# EAGLE board untitled (EAGLE 8.6.0)
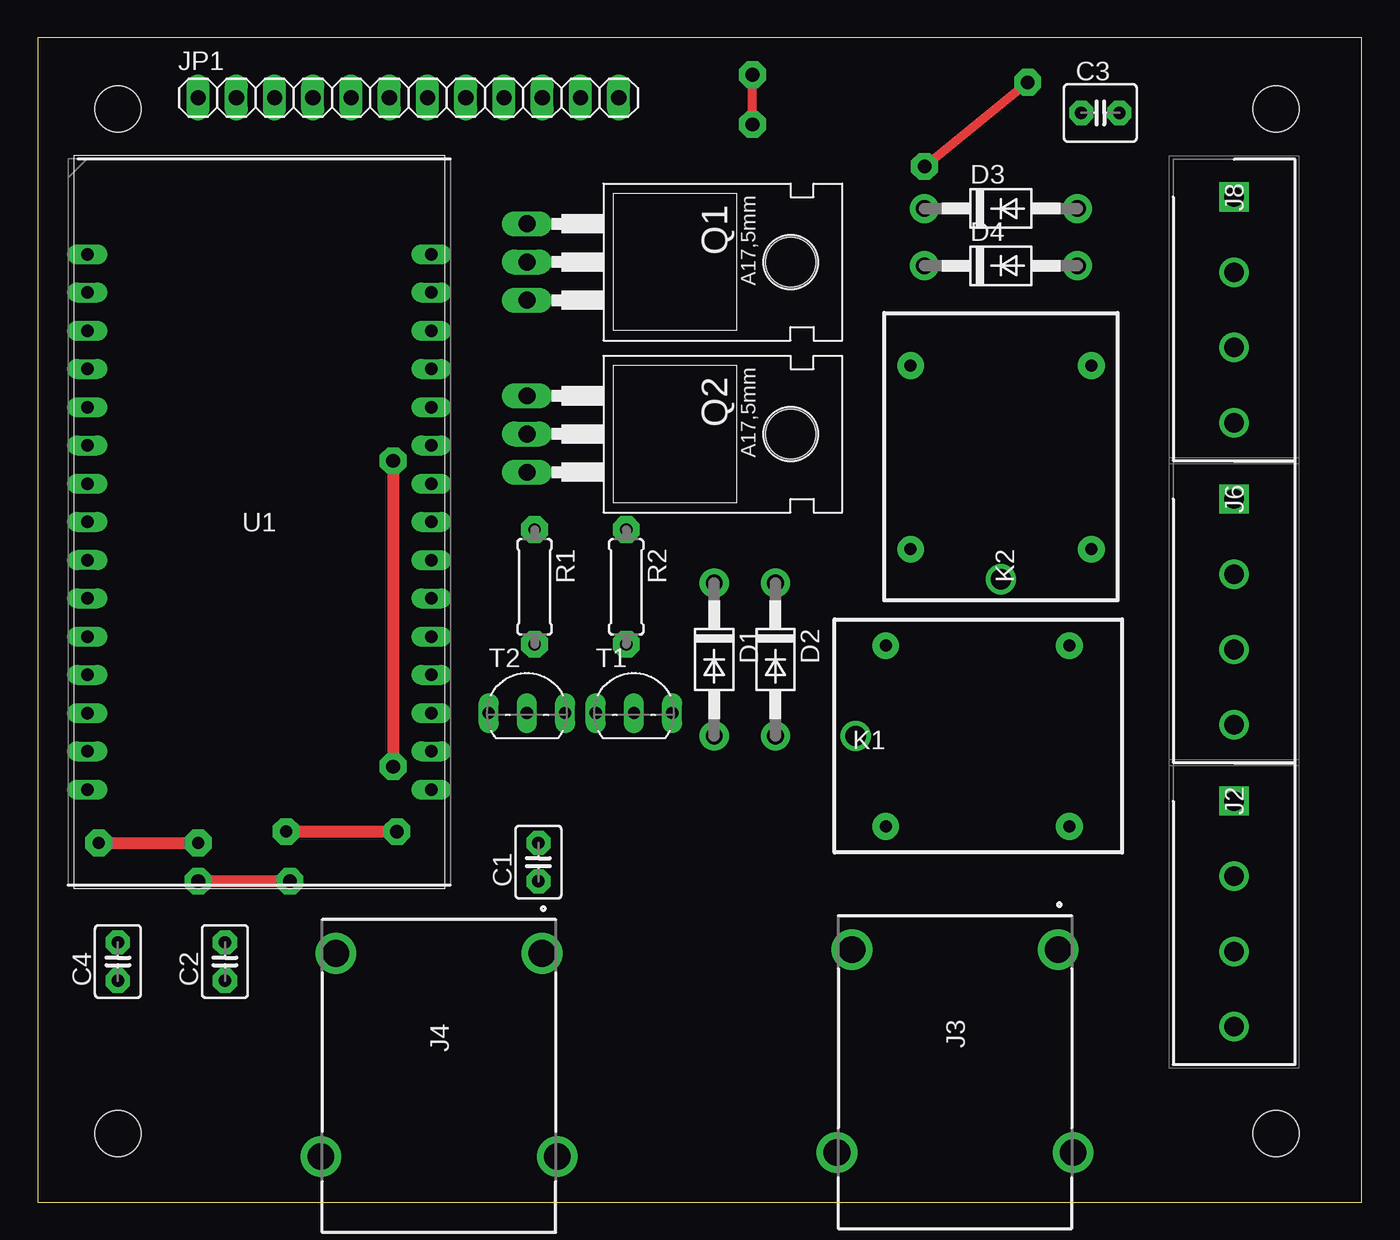
[diagram p0: board, top side]
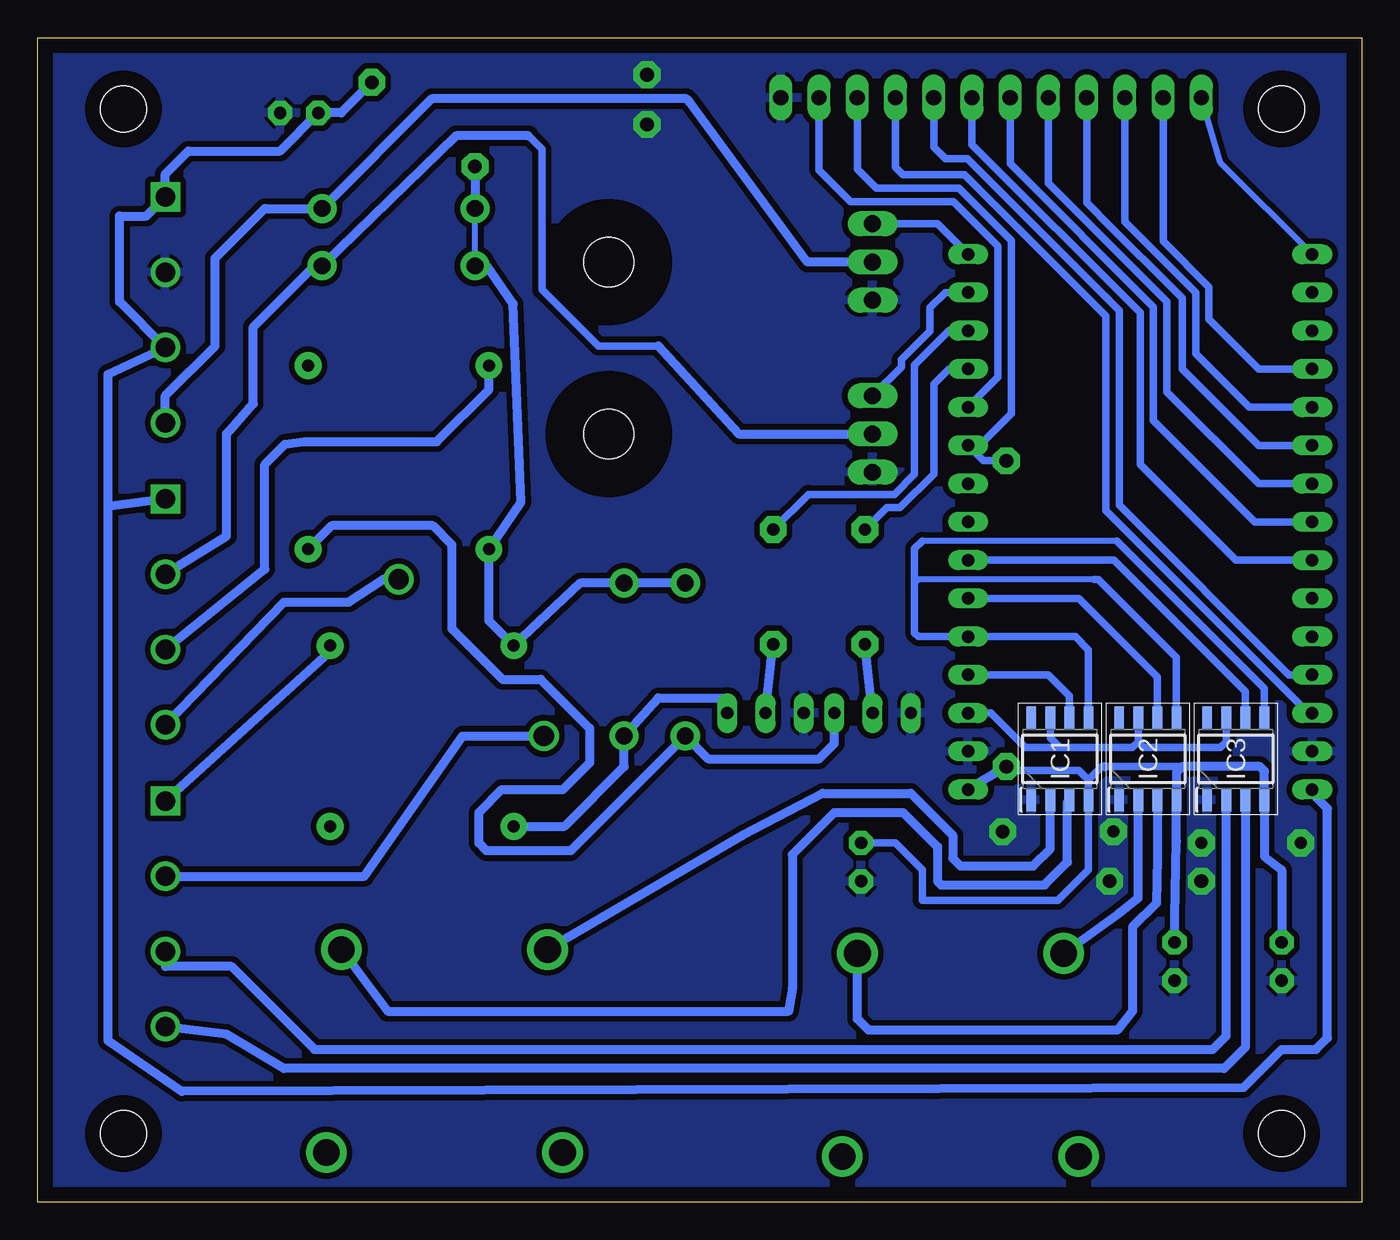
[diagram p1: board, bottom side, seen from below]

Size 87.99 x 77.39 mm. Coordinates in mm from the lower left corner, seen from the top.
Outline: 0,0 87.99,0 87.99,77.39 0,77.39 0,0
Copper layers (1*16): Top 0.035mm / dielectric 1.5mm / Bottom 0.035mm
Design rules "default": minimum track width 6mil, minimum drill 0.35mm, track to track 6mil, track to pad 6mil, pad to pad 6mil, via to via 6mil, smd to smd 6mil, copper to edge 40mil, drill to drill 6mil, minimum pad ring 10mil, minimum via ring 8mil, stop-mask expansion 4mil, vias tented up to drill 0mil, thermal gap 10mil
Net classes: 0 default: width 2.54 mm, clearance 0.381 mm; 1 POWER: width 5.08 mm, clearance 0.381 mm
Holes 3.05 mm at 5.33,72.64 5.33,4.57 82.3,4.57 82.3,72.64

## Footprints (pad centres in the part's own frame; a part is rotated, then mirrored left to right if it is on the bottom)
C2.5-3 = drill 0.813 pad 1.6 octagon: 1 -1.27,0; 2 1.27,0
C2.5-4 = drill 0.813 pad 1.6 octagon: 1 -1.27,0; 2 1.27,0
DO41-10 = drill 1.118 pad 1.93: A 5.08,0; C -5.08,0
SOIC127P600X175-8N = smd 1.525 x 0.65: 1 -2.712,1.905; 2 -2.712,0.635; 3 -2.712,-0.635; 4 -2.712,-1.905; 5 2.712,-1.905; 6 2.712,-0.635; 7 2.712,0.635; 8 2.712,1.905
SHDR4W110P0X500_1X4_2000X810X1 = drill 1.3 pad 1.95 square: 1 0,0 | drill 1.3 pad 1.95: 2 5,0; 3 10,0; 4 15,0
PCC-SMP = drill 1.77 pad 2.7: 1 2.25,6.85; 2 2.25,-6.85; 3 15.75,7.85; 4 15.75,-7.85
1X12 = drill 1.016 long: 1 -13.97,0; 2 -11.43,0; 3 -8.89,0; 4 -6.35,0; 5 -3.81,0; 6 -1.27,0; 7 1.27,0; 8 3.81,0; 9 6.35,0; 10 8.89,0; 11 11.43,0; 12 13.97,0
SRD = drill 1.34 pad 1.84: 1 0,0 | drill 0.8 pad 1.778: 2 2,6; 3 2,-6; 4 14.2,6; 5 14.2,-6
TO220 = drill 1.118 long: 1 -2.54,-6.35; 2 0,-6.35; 3 2.54,-6.35 | hole 3.302: 0,11.176
0207/7 = drill 0.813 pad 1.778 octagon: 1 -3.81,0; 2 3.81,0
TO92-EBC-OVAL = drill 0.813 long: B 0,-1.27; C 2.54,-1.27; E -2.54,-1.27
DIP2286W64P254L4826H735Q30N = drill 0.835 pad 1.27 long: 1 -11.43,17.78; 2 -11.43,15.24; 3 -11.43,12.7; 4 -11.43,10.16; 5 -11.43,7.62; 6 -11.43,5.08; 7 -11.43,2.54; 8 -11.43,0; 9 -11.43,-2.54; 10 -11.43,-5.08; 11 -11.43,-7.62; 12 -11.43,-10.16; 13 -11.43,-12.7; 14 -11.43,-15.24; 15 -11.43,-17.78; 16 11.43,-17.78; 17 11.43,-15.24; 18 11.43,-12.7; 19 11.43,-10.16; 20 11.43,-7.62; 21 11.43,-5.08; 22 11.43,-2.54; 23 11.43,0; 24 11.43,2.54; 25 11.43,5.08; 26 11.43,7.62; 27 11.43,10.16; 28 11.43,12.7; 29 11.43,15.24; 30 11.43,17.78

## Placement (x,y rotation side)
C1  [C2.5-3]  33.27,22.61 90 top
C2  [C2.5-3]  12.45,16 90 top
C3  [C2.5-4]  70.61,72.39 0 top
C4  [C2.5-3]  5.33,16 90 top
D1  1N4004  [DO41-10]  44.96,36.07 270 top
D2  1N4004  [DO41-10]  49.02,36.07 270 top
D3  1N4004  [DO41-10]  64.01,66.04 0 top
D4  1N4004  [DO41-10]  64.01,62.23 0 top
IC1  MAX31855RASA+  [SOIC127P600X175-8N]  20.07,29.46 90 bottom
IC2  MAX31855RASA+  [SOIC127P600X175-8N]  14.22,29.46 90 bottom
IC3  MAX31855RASA+  [SOIC127P600X175-8N]  8.38,29.46 90 bottom
J2  1729034  [SHDR4W110P0X500_1X4_2000X810X1]  79.5,26.67 270 top
J3  PCC-SMP-K-100-R-ROHS  [PCC-SMP]  60.96,19.05 270 top
J4  PCC-SMP-K-100-R-ROHS  [PCC-SMP]  26.67,18.8 270 top
J6  1729034  [SHDR4W110P0X500_1X4_2000X810X1]  79.5,46.74 270 top
J8  1729034  [SHDR4W110P0X500_1X4_2000X810X1]  79.5,66.8 270 top
JP1  [1X12]  24.64,73.41 0 top
K1  SRD-12VDC-SL-C  [SRD]  54.36,30.99 0 top
K2  SRD-12VDC-SL-C  [SRD]  64.01,41.4 90 top
Q1  BUZ10  [TO220]  38.86,62.48 270 top
Q2  BUZ10  [TO220]  38.86,51.05 270 top
R1  [0207/7]  33.02,40.89 270 top
R2  [0207/7]  39.12,40.89 270 top
T1  2N2222  [TO92-EBC-OVAL]  39.62,33.78 0 top
T2  2N2222  [TO92-EBC-OVAL]  32.51,33.78 0 top
U1  113990105  [DIP2286W64P254L4826H735Q30N]  14.73,45.21 0 top

## Library data of the parts
C1-C4 = capacitor-wima
D1-D4 JP1 R1 R2 T1 T2 = adafruit
IC1-IC3 = MAX31855RASA+; DESCRIPTION: Thermocouple-to-Digital, type R SOIC8 Maxim MAX31855RASA+, Thermocouple Amplifier, 3.3 V, 8-Pin SOIC; HEIGHT: 1.75mm; MANUFACTURER_NAME: Maxim Integrated; MANUFACTURER_PART_NUMBER: MAX31855RASA+; RS_PART_NUMBER: 7833891P; SUPPLIER_NAME: RS
J2 J6 J8 = 1729034; ALLIED_NUMBER: 70054377; DESCRIPTION: Low profile PCB terminal block,5mm,4 way Phoenix Contact COMBICON MKDSN Series 5mm Pitch Straight PCB Terminal Block with Screw Termination, Through Hole, 4 Way; HEIGHT: 10mm; MANUFACTURER_NAME: Phoenix Contact; MANUFACTURER_PART_NUMBER: 1729034; RS_PART_NUMBER: 8020620
J3 J4 = PCC-SMP-K-100-R-ROHS; DESCRIPTION: NEWPORT ELECTRONICS - PCC-SMP-K-100-R-ROHS - CIRCUIT BOARD THERMOCOUPLE, K TYPE; HEIGHT: mm; MANUFACTURER_NAME: NEWPORT ELECTRONICS; MANUFACTURER_PART_NUMBER: PCC-SMP-K-100-R-ROHS; SUPPLIER_NAME: RS
K1 K2 = SRD-12VDC-SL-C; DESCRIPTION: SRD Relay, ISO9002, 10A Switching Cap. Sealed Type, 0.36W, 1 Form C; HEIGHT: mm; MANUFACTURER_NAME: Songle Relay; MANUFACTURER_PART_NUMBER: SRD-12VDC-SL-C; SUPPLIER_NAME: RS
Q1 Q2 = transistor-fet
U1 = 113990105; DESCRIPTION: NodeMCU DEVKIT V1.0; HEIGHT: 7.35mm; MANUFACTURER_NAME: Seeed Studio; MANUFACTURER_PART_NUMBER: 113990105; SUPPLIER_NAME: RS

## Nets
3V3: C1.2 C2.2 C4.2 IC1.4 IC2.4 IC3.4 JP1.10 U1.16 U1.25
A0: JP1.1 U1.1
BLOWER1: D3.A J8.4 Q1.2
BLOWER2: D4.A J6.2 Q2.2
BLOWER_1: Q1.1 U1.30
BLOWER_2: Q2.1 U1.29
CLK: JP1.7 U1.9
CMD: JP1.5 U1.7
CS_1: IC1.6 U1.19
CS_2: IC2.6 U1.21
CS_3: IC3.6 U1.22
D0: JP1.6 U1.8
D1: JP1.4 U1.6
D2: JP1.3 U1.5
D3: JP1.2 U1.4
D4: JP1.11 U1.26
EN: JP1.8 U1.12
GND: C1.1 C2.1 C3.2 C4.1 IC1.1 IC2.1 IC3.1 J8.2 JP1.12 Q1.3 Q2.3 T1.E T2.E U1.14 U1.17
GND(1): U1.10
GND(4): U1.24
N$1: R1.2 T2.B
N$2: D1.A K2.3 T2.C
N$3: R2.2 T1.B
N$8: D2.A K1.3 T1.C
RELAY1(+) [POWER]: J2.1 K1.4
RELAY1(-) [POWER]: J2.2 K1.1
RELAY2(+) [POWER]: J6.3 K2.4
RELAY2(-) [POWER]: J6.4 K2.1
RELAY_1: R2.1 U1.28
RELAY_2: R1.1 U1.27
RST: JP1.9 U1.13
SCK: IC1.5 IC2.5 IC3.5 U1.20
SO: IC1.7 IC2.7 IC3.7 U1.18
SO_1: U1.23
T1+: IC1.3 J3.1
T1-: IC1.2 J3.2
T2+: IC2.3 J4.1
T2-: IC2.2 J4.2
T3+: IC3.3 J2.4
T3-: IC3.2 J2.3
VDD: C3.1 D1.C D2.C D3.C D4.C J6.1 J8.1 J8.3 K1.2 K2.2 U1.15
VDD3V3(1): U1.11

## Tracks (layer width: path | path; a pad name or v marks a point on that pad's centre or on a via)
3V3  (via drill 0.9 pad 1.78)
  Top 0.813: v23.62,49.28 v23.62,28.96
  Bottom 0.508: JP1.10 33.53,68.66 32.26,67.39 26.78,67.39 23.3,63.9 23.3,52.4 25.4,50.29 U1.25 25.15,49.28 v23.62,49.28 | 13.13,28.96 13.12,28.96 11.94,28.96 17.1,28.96 17.27,28.96 18.16,28.07 | 18.16,28.07 IC1.4 18.16,22.09 20.19,20.07 29.21,20.07 29.21,22.1 30.99,23.88 C1.2 | 18.16,28.07 18.8,28.7 23.37,28.7 v23.62,28.96
  Bottom 0.61: C2.2 12.32,24 IC2.4 12.32,28.57 11.94,28.96 10.75,28.96 6.78,28.96 6.48,28.67 6.48,27.77 IC3.4 6.48,22.99 5.33,22.1 C4.2 | U1.16 v23.62,28.96 23.45,28.96 | 17.1,28.96
A0
  Bottom 0.406: U1.1 9.4,69.09 JP1.1
BLOWER1
  Bottom 0.406: 69.83,66.04 D3.A
  Bottom 0.61: Q1.2 36.83,62.48 44.69,73.13 | 44.69,73.13 44.7,73.15 | 44.69,73.13 44.88,73.33 61.8,73.33 D3.A 72.9,66.04 76.2,62.74 76.2,56.9 79.5,53.59 J8.4
BLOWER2
  Bottom 0.508: 46.74,56.9 50.74,56.9 54.48,60.64 54.48,69.98 55.37,70.87
  Bottom 0.61: Q2.2 41.4,51.05 46.74,56.9 | 55.37,70.87 60.2,70.87 D4.A 69.6,62.23 73.66,58.17 73.66,53.06 73.68,53.06 75.44,51.05 75.44,44.28 J6.2
BLOWER_1
  Bottom 0.508: U1.30 28.19,65.02 Q1.1
BLOWER_2
  Bottom 0.508: Q2.1 30.61,55.5 30.61,55.99 28.7,57.9 28.7,59.44 27.69,60.45 U1.29
CLK
  Bottom 0.508: JP1.7 25.91,70.29 14.73,59.11 14.73,49.02 8.38,42.67 U1.9
CMD
  Bottom 0.508: JP1.5 20.83,67.72 12.95,59.85 12.95,53.85 6.86,47.75 U1.7
CS_1
  Bottom 0.508: IC1.6 19.43,33.66 20.83,35.05 U1.19
CS_2
  Bottom 0.508: IC2.6 13.59,34.92 18.8,40.13 U1.21
CS_3
  Bottom 0.508: IC3.6 7.75,33.94 16.48,42.67 U1.22
D0
  Bottom 0.508: JP1.6 23.37,69 13.84,59.48 13.84,51.94 7.11,45.21 U1.8
D1
  Bottom 0.508: JP1.4 18.29,66.44 17.58,65.73 17.33,65.48 11.94,60.09 11.94,55.37 6.86,50.29 U1.6
D2
  Bottom 0.508: JP1.3 15.75,65.16 11.05,60.46 11.05,56.39 7.49,52.83 U1.5
D3
  Bottom 0.508: JP1.2 13.21,63.87 10.16,60.82 10.16,58.67 6.86,55.37 U1.4
D4
  Bottom 0.508: U1.26 26.16,52.85 24.18,54.83 24.18,63.53 27.15,66.5 33.98,66.5 36.07,68.58 JP1.11
EN
  Bottom 0.406: 4.29,35.05 U1.12
  Bottom 0.508: U1.12 4.85,35.05 16.13,46.34 16.13,59.25 26.22,69.34 27.69,69.34 28.45,70.1 JP1.8
GND  (via drill 0.8 pad 1.78, 0.9 pad 1.78)
  Top 0.61: v47.5,71.63 v47.5,74.93
  Top 0.813: v16.51,24.64 v23.88,24.64 | v16.76,21.34 v10.67,21.34 | v4.06,23.88 v10.67,23.88
  pour Bottom: -2.54,-2.54 90.42,-2.54 90.42,79.76 -2.29,79.76 -2.79,79.25 -2.79,-2.29
N$1
  Bottom 0.61: T2.B R1.2
N$2
  Bottom 0.61: K2.3 68.45,44.96 61.72,44.96 60.45,43.69 60.45,38.1 57.1,34.75 54.56,34.75 51.31,31.5 51.31,29.21 53.09,27.43 57.15,27.43 58.67,25.91 58.67,23.88 58.17,23.37 52.58,23.37 D1.A 43.43,29.46 36.07,29.46 35.05,30.48 T2.C
N$3
  Bottom 0.61: T1.B R2.2
N$8
  Bottom 0.61: T1.C 42.16,33.53 46.74,33.53 D2.A 49.02,28.96 52.99,24.99 K1.3
RELAY1(+)
  Bottom 0.61: J2.1 68.56,36.6 K1.4
RELAY1(-)
  Bottom 0.61: J2.2 66.29,21.67 59.77,30.99 K1.1
RELAY2(+)
  Bottom 0.61: K2.4 58.01,54.01 61.47,50.55 70.28,50.55 71.55,50.37 72.9,49.02 72.9,42.07 J6.3
RELAY2(-)
  Bottom 0.61: J6.4 71.61,39.88 67.31,39.88 65.02,41.4 K2.1
RELAY_1
  Bottom 0.508: R2.1 36.78,47.04 31.06,47.04 29.72,48.39 29.72,55.63 27.43,57.91 U1.28
RELAY_2
  Bottom 0.508: R1.1 31.57,46.15 30.7,46.15 28.45,48.4 28.45,54.36 27.43,55.37 U1.27
RST
  Bottom 0.406: 3.37,32.51 U1.13
  Bottom 0.508: JP1.9 30.99,68.78 30.48,68.27 26.41,68.27 17.02,58.88 17.02,45.97 15.83,44.78 | 3.37,32.51 3.56,32.51 15.83,44.78 | 15.83,44.78
SCK
  Bottom 0.406: 29.72,41.15 29.46,41.4 17.78,41.4 | 16.27,43.94 29.21,43.94
  Bottom 0.508: 16.27,43.94 6.48,34.14 IC3.5 | 29.21,43.94 29.72,43.43 29.72,41.15 29.72,37.85 29.46,37.59 U1.20 19.05,37.59 18.16,36.7 IC1.5 | IC2.5 12.32,36.2 17.53,41.4 17.78,41.4
SO
  Bottom 0.508: IC3.7 9.02,30.61 9.4,30.23 14.48,30.23 14.86,30.61 | IC2.7 14.86,30.61 | 14.86,30.61 15.24,30.23 20.07,30.23 | IC1.7 20.7,30.86 20.07,30.23 | 20.07,30.23 22.35,30.23 24.64,32.51 U1.18
T1+
  Bottom 0.61: J3.1 64.73,12.7 38.1,12.7 37.85,14.22 37.85,23.11 35.05,25.91 30.48,25.91 28.19,23.62 28.19,21.34 27.94,21.08 21.08,21.08 19.56,22.61 19.56,26.62 IC1.3
T1-
  Bottom 0.61: J3.2 41.16,24.38 35.81,27.18 29.97,27.18 27.18,24.39 27.18,22.86 26.67,22.35 21.84,22.35 20.7,23.5 IC1.2
T2+
  Bottom 0.61: IC2.3 13.59,22.87 13.65,19.88 15.24,18.29 15.24,12.7 16.26,11.43 32.77,11.43 33.53,12.19 33.52,12.2 J4.1
T2-
  Bottom 0.61: J4.2 16.14,19.21 14.86,20.22 IC2.2
T3+
  Bottom 0.61: IC3.3 7.75,10.29 9.14,8.89 71.63,8.89 75.42,11.16 J2.4
T3-
  Bottom 0.61: J2.3 79.49,15.67 75.11,15.67 69.6,10.16 9.91,10.16 9.02,11.05 IC3.2
VDD  (via drill 0.9 pad 1.78)
  Top 0.61: v58.93,68.83 v65.79,74.42
  Bottom 0.406: D1.C 45.21,41.4 | D4.C D3.C
  Bottom 0.61: D1.C D2.C 51.94,41.15 K1.2 58.01,38.64 K2.2 55.88,46.55 56.39,59.69 58.17,62.23 D4.C | 2.79,27.43 U1.15 3.3,27.18 2.29,26.16 2.29,10.92 3.05,10.16 5.33,10.16 7.87,7.62 78.41,7.37 83.31,10.74 83.31,46.23 | v58.93,68.83 D3.C | v65.79,74.42 67.82,72.39 C3.1 71.88,69.85 77.98,69.85 79.5,68.33 J8.1 80.77,65.53 82.55,65.53 82.55,59.85 J8.3 83.31,55.02 83.31,46.23 | J6.1 83.31,46.23